# Allegro board AVRUSB500.brd
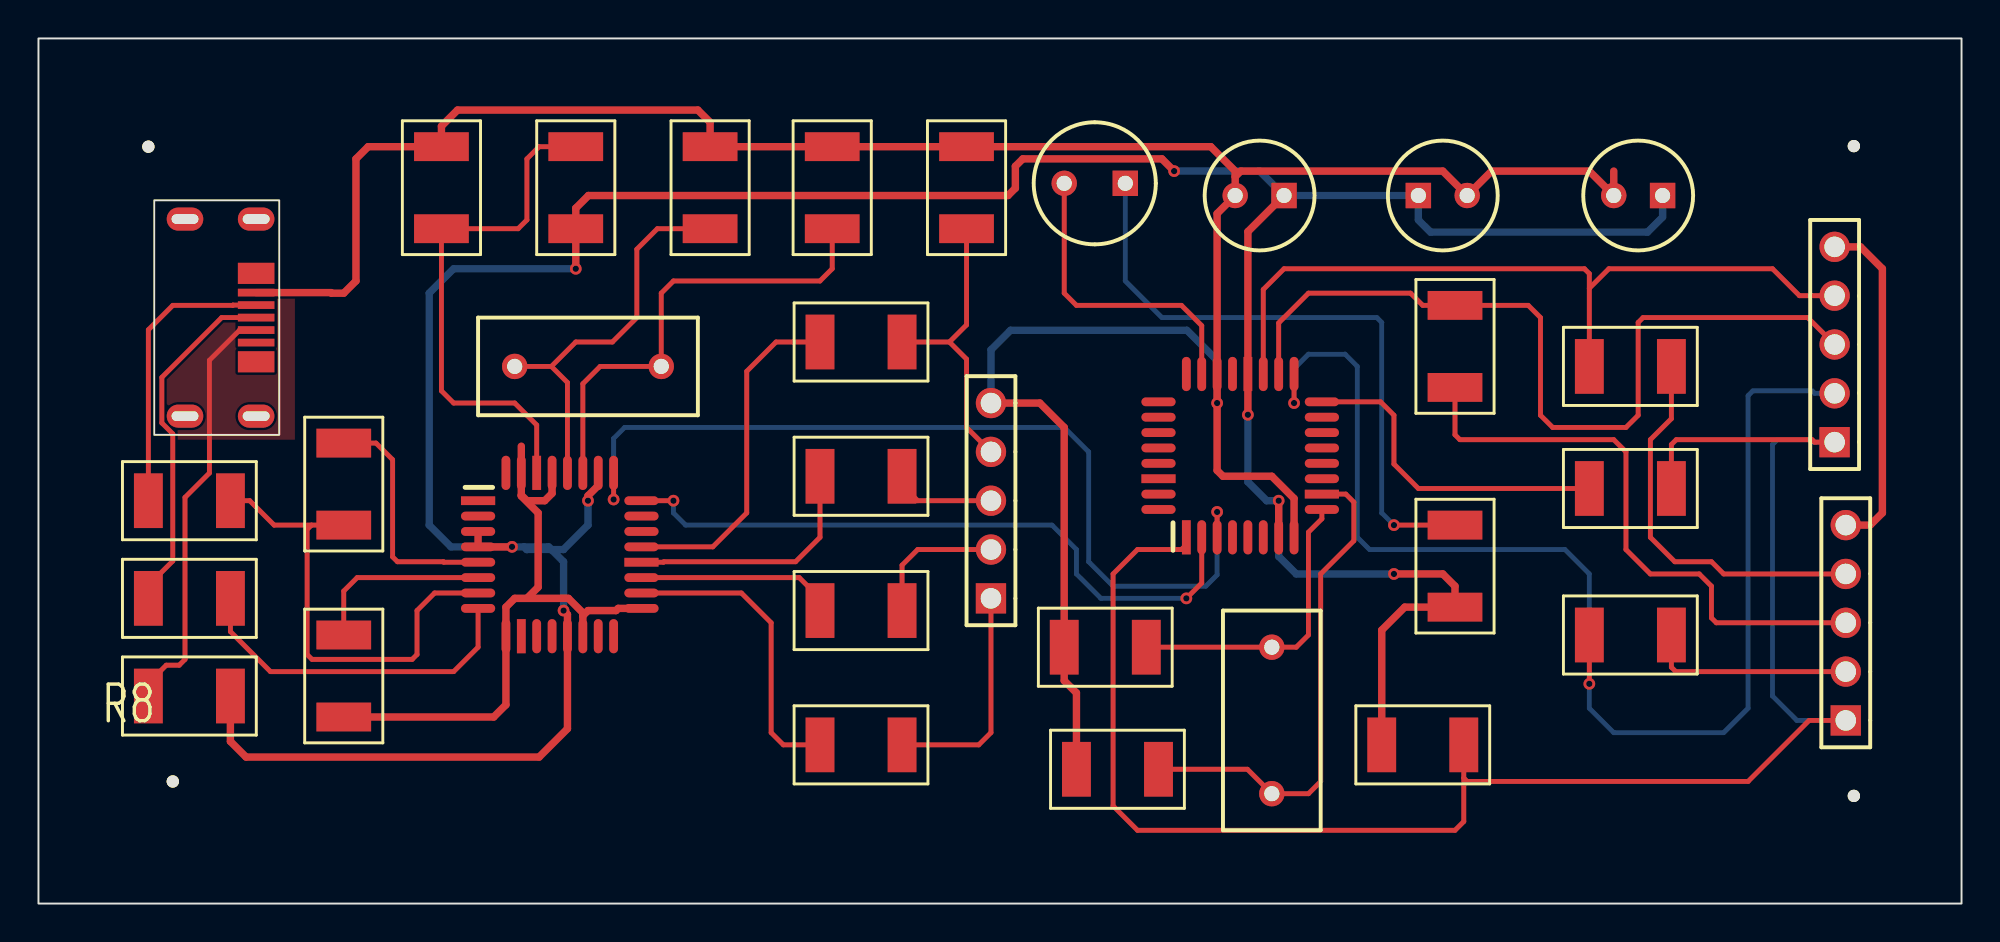
[diagram p0: board, top side]
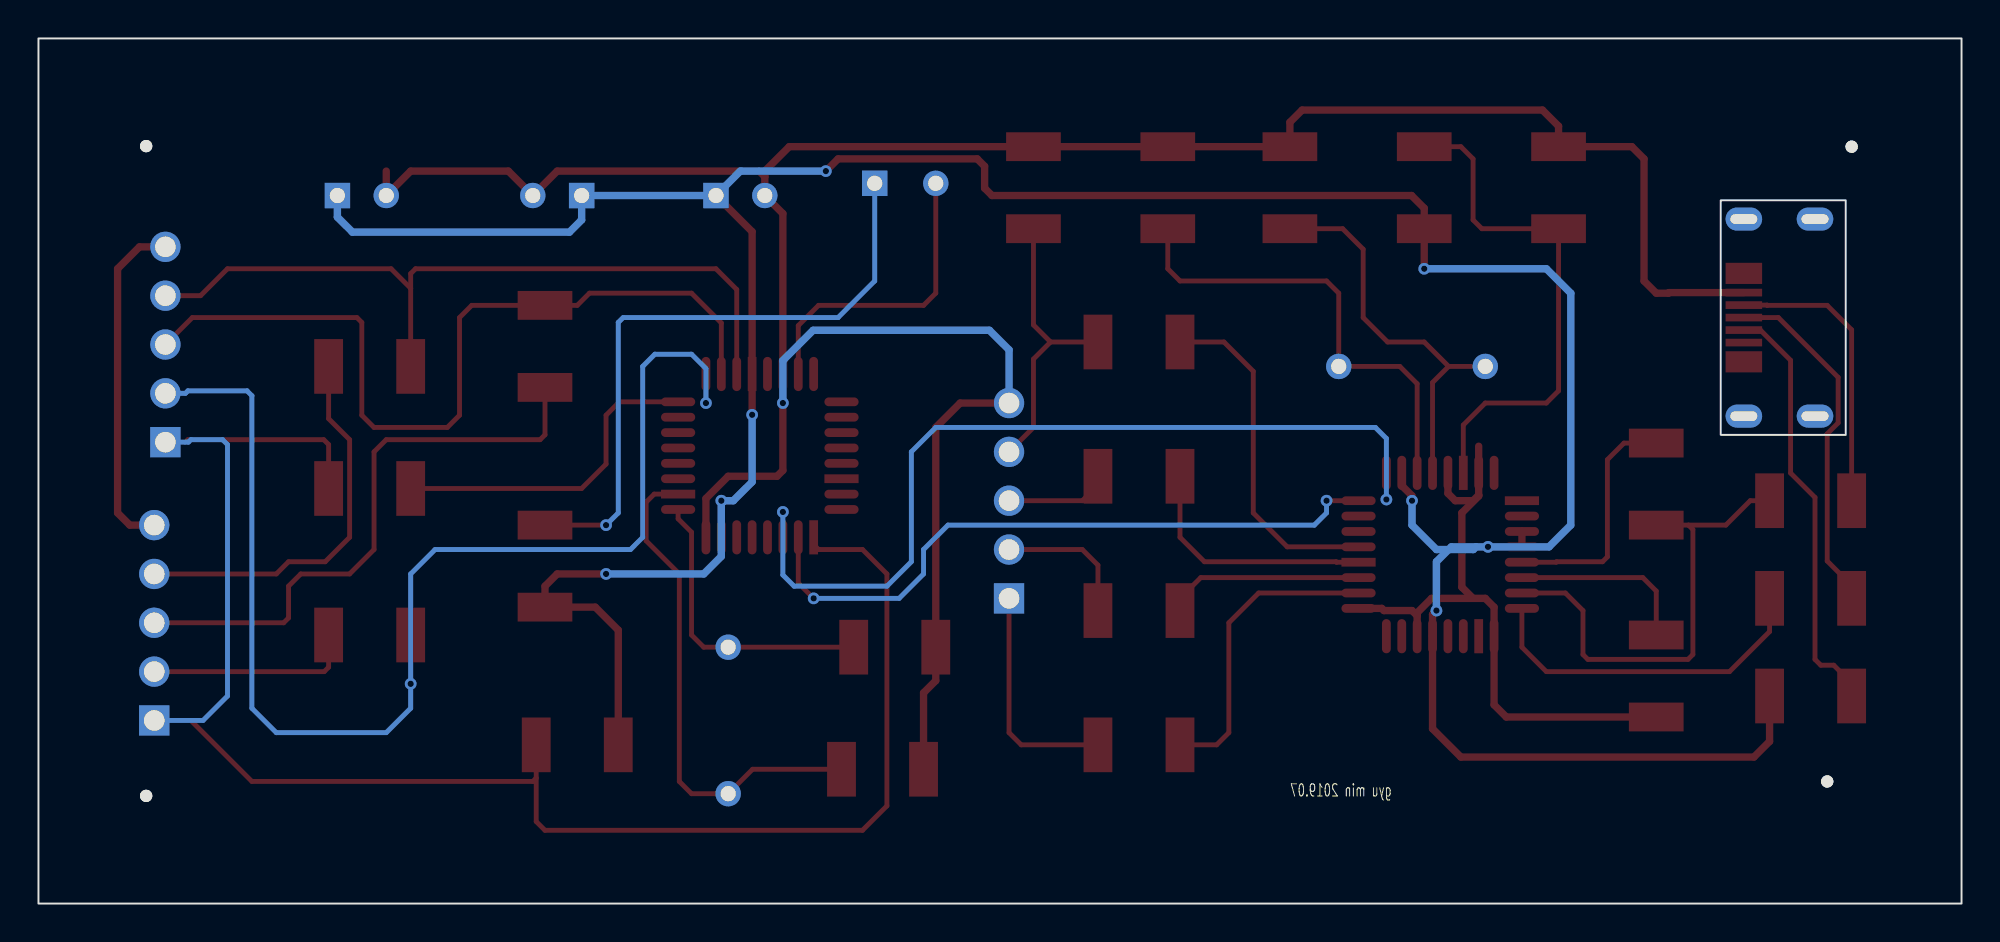
[diagram p1: board, bottom side, seen from below]

Outline 100 x 45 mm; copper layers: TOP, BOTTOM. Coordinates in mm from the lower left corner of the outline.
Outline path: rectangle 0,0 100,45

## Design rules (mm)
constraint set DEFAULT: min track width 0.254

## Placement (name value [footprint] x y rotation side)
C1  47nF  [SML2015]  20.95 39.37 270 top
C2  27pF  [SML2015]  34.92 39.37 270 top
C3  27pF  [SML2015]  41.27 39.37 270 top
C4  47nF  [SML2015]  15.88 13.97 270 top
C5  100nF  [CPCYL1D225LS100031]  64.77 36.83 180 top
C6  1uF  [CPCYL1D225LS100031]  84.45 36.83 180 top
C7  100nF  [SML2015]  53.34 13.34 0 top
C8  100nF  [SML2015]  53.98 6.99 0 top
C9  100nF  [CPCYL1D225LS100031]  71.75 36.83 0 top
C10  22nF  [SML2015]  48.26 39.37 270 top
D1  LED  [CYLD250LS125031]  56.52 37.47 180 top
IC1  ATmega8  [QUAD80M32WG900]  59.69 19.05 0 top
J1  bbpg_Bitbang  [BLKCON100VHTM1SQSW1005]  49.53 15.88 90 top
J2  USBA  [MICRO_USB]  7.62 30.48 270 top
J3  avrusb500_out  [BLKCON100VHTM1SQSW1005]  93.98 9.53 90 top
J4  firmware_in  [BLKCON100VHTM1SQSW1005]  93.4 24 90 top
NOREF  -  [unnamed]  94.4 5.6 0 top
NOREF#2  -  [unnamed]  5.71 39.37 0 top
NOREF#3  -  [unnamed]  6.99 6.35 0 top
NOREF#4  -  [unnamed]  94.4 39.4 0 top
R1  470  [SML2015]  27.94 39.37 270 top
R2  220  [SML2015]  40.64 29.21 0 top
R3  220  [SML2015]  40.64 22.23 0 top
R4  220  [SML2015]  40.64 15.24 0 top
R5  27  [SML2015]  5.71 15.88 0 top
R6  27  [SML2015]  5.71 20.95 0 top
R7  1.5k  [SML2015]  15.88 19.68 90 top
R8  2.2  [SML2015]  5.71 10.79 0 top
R9  10k  [SML2015]  69.85 8.26 0 top
R10  470  [SML2015]  73.66 19.68 270 top
R11  1k  [SML2015]  80.64 27.94 0 top
R12  220  [SML2015]  73.66 31.11 270 top
R13  1k  [SML2015]  80.64 13.97 0 top
R14  220  [SML2015]  40.64 8.26 0 top
R15  220  [SML2015]  80.64 21.59 0 top
U1  FT232BM  [QUAD80M32WG900]  22.86 20.95 270 top
Y1  3.6864Mhz  [RAD450X200LS300031]  64.14 5.71 90 top
Y2  6Mhz  [RAD450X200LS300031]  24.77 27.94 0 top

## Library data of the parts
C1-C4 C7 C8 C10 = CAPACITOR NON-POL: alternate symbols: (SML2015)
C5 C9 = CAPACITOR NON-POL: alternate symbols: (SMDCAP)
C6 = CAPACITOR POL: alternate symbols: (SMDCAP)
D1 = LED
IC1 = ATmega8-DIL28_1
J1 J3 J4 = CON5
J2 = CON4_7
R1-R15 = R: alternate symbols: (SML2015)
U1 = FT232BM_2: alternate symbols: (JEDECMS026)
Y1 Y2 = ZTA

## Footprints (pads in the part's own frame, mm; a bottom-side part is the same pattern mirrored in y, then rotated)
BLKCON100VHTM1SQSW1005
  rect 1.575x1.575 hole 1.067: 1(0,0)
  round 1.575 hole 1.067: 2(2.54,0) 3(5.08,0) 4(7.62,0) 5(10.16,0)
CPCYL1D225LS100031
  rect 1.321x1.321 hole 0.787: 1(0,0)
  round 1.321 hole 0.787: 2(2.54,0)
CYLD250LS125031
  rect 1.321x1.321 hole 0.787: 1(0,0)
  round 1.321 hole 0.787: 2(3.175,0)
MICRO_USB
  oval 1.2x1.9 hole 0.5x1.4: (-5.125,3.7) (-5.125,0) (5.125,3.7) (5.125,0)
  rect 1.1x1.9 smd: (-2.3,3.7) (2.3,3.7)
  rect 0.4x1.9 smd: 1(-1.3,3.7) 2(-0.65,3.7) 3(0,3.7) 4(0.65,3.7) 5(1.3,3.7)
QUAD80M32WG900
  rect 0.457x1.778 smd: 1(0,0) 20(3.2,8.496)
  oval 0.457x1.778 smd: 2(0.8,0) 3(1.6,0) 4(2.4,0) 5(3.2,0) 6(4,0) 7(4.801,0) 8(5.601,0) 17(5.601,8.496) 18(4.801,8.496) 19(4,8.496) 21(2.4,8.496) 22(1.6,8.496) 23(0.8,8.496) 24(0,8.496)
  oval 1.778x0.457 smd: 9(7.048,1.448) 11(7.048,3.048) 12(7.048,3.848) 13(7.048,4.648) 14(7.048,5.448) 15(7.048,6.248) 16(7.048,7.048) 25(-1.448,7.048) 26(-1.448,6.248) 27(-1.448,5.448) 28(-1.448,4.648) 29(-1.448,3.848) 31(-1.448,2.248) 32(-1.448,1.448)
  rect 1.778x0.457 smd: 10(7.048,2.248) 30(-1.448,3.048)
RAD450X200LS300031
  round 1.321 hole 0.787: 1(0,0) 2(7.62,0)
SML2015
  rect 1.499x2.845 smd: 1(0,0) 2(4.267,0)
unnamed
  round 0.635 hole 3.175 unplated: (0,0)

## Nets
+5V: J2.4 R8.1
GND: C1.1 C2.1 C3.1 C4.2 C5.2 C6.2 C7.1 C8.1 C9.2 C10.1 IC1.8 IC1.22 J1.5 J2.1 J3.5 J4.5 U1.9 U1.14 U1.17 U1.29 U1.31
VCC: C5.1 C6.1 C9.1 IC1.7(VCC) IC1.20 R1.2 R8.2 R9.1 R10.2 U1.3 U1.4 U1.13 U1.26
BMISO: J1.3 R3.2
BMOSI: J1.2 R4.2
BRESET: J1.1 R14.2
BSCK: C10.2 J1.4 R2.2
D+: J2.2 R6.1
D-: J2.3 R5.1
F_MISO: IC1.18 J4.3 R12.1
F_MOSI: IC1.17 J4.2 R13.1
F_SCK: IC1.19 J4.4 R11.1
MISO: J3.3 R12.2
MOSI: J3.2 R13.2
RESET: IC1.1 J3.1 J4.1 R9.2 R15.2
RXD: IC1.2 U1.24
SCK: J3.4 R11.2
TXD: IC1.3 U1.25
N02483: R6.2 R7.1 U1.7
N02615: R5.2 U1.8
N03527: C4.1 U1.6
N06839: R2.1 U1.21
N06967: R3.1 U1.20
N07033: R4.1 U1.19
N07247: R14.1 U1.18
N11951: R7.2 U1.5
N15182: C7.2 IC1.9 Y1.2
N15289: C8.2 IC1.10 Y1.1
N19734: D1.2(CATHODE) IC1.23
N20572: D1.1 R10.1
N22544: IC1.16 R15.1
N41098: C3.2 U1.27 Y2.2
N41106: C2.2 U1.28(XTOUT) Y2.1
N49165: C1.2 R1.1 U1.30

Pads without a net: IC1 4 5 6 11 12 13 14 15 21 24 25 26 27 28 29 30 31 32; J2 5; U1 1 2 10 11 12 15 16 22 23 32

## Via types
v1: diameter 0.61, hole 0.33, TOP to BOTTOM, 16 vias

## Routing (per net, layer and track width the routed paths; a pad name or vN(x,y) marks a point on that pad's centre or on a via; arc(x,y) is an arc through that point)
+5V: length 22.3
  TOP w0.254: J2.4 10.46,29.83 8.89,28.26 8.89,22.39 7.62,21.12 7.62,12.7 7.32,12.4 6.64,12.4 5.71,11.47 R8.1
GND: length 198.7
  TOP w0.382: 93.98,19.68 95.25,19.68 95.89,20.32 95.89,33.02 94.75,34.16 J4.5 ; 25.11,21.25 25.11,21.2 25.98,20.32 25.98,16.46 25.4,15.88 ; 25.11,21.25 U1.31 25.11,23.79 ; 25.11,21.25 25.4,20.95 26.33,20.95 26.71,21.34 U1.29 ; 62.23,37.81 62.52,38.1 73.03,38.1 C9.2 75.56,38.1 80.64,38.1 81.92,36.83 81.92,38.1 ; 62.23,37.81 C5.2 61.29,35.89 IC1.22 v1(61.29,26.03) 61.29,22.53 61.59,22.23 64.14,22.23 65.29,21.07 IC1.8 ; 62.23,37.81 62.23,38.1 60.96,39.37 C10.1 C3.1 C2.1 34.92,40.64 34.29,41.27 21.79,41.27 20.95,40.44 C1.1 17.14,39.37 16.51,38.73 16.51,32.38 15.88,31.75 15.24,31.75 15.21,31.78 J2.1 ; 25.4,15.88 24.77,15.88 24.31,15.42 24.31,10.34 23.67,9.7 C4.2 ; 25.4,15.88 27.56,15.88 28.31,15.12 28.31,14.97 ; 28.31,14.97 28.57,15.24 30.04,15.24 30.15,15.35 U1.17 ; 28.31,14.97 28.31,13.91 ; C8.1 53.98,10.96 53.34,11.59 C7.1 53.34,24.77 52.07,26.04 J1.5
  BOTTOM w0.382: v1(61.29,26.03) 61.29,28.25 59.72,29.82 50.55,29.82 49.53,28.8 J1.5
VCC: length 175.8
  TOP w0.382: v1(28.57,20.95) 28.57,21.21 29.11,21.74 U1.26 ; v1(59.05,38.1) 58.42,38.73 51.18,38.73 50.8,38.35 50.8,37.21 50.42,36.83 28.6,36.83 27.94,36.17 v1(27.94,33.02) ; v1(27.3,15.24) 27.51,15.04 27.51,9.09 26.04,7.62 10.79,7.62 9.98,8.43 R8.2 ; v1(62.89,25.43) IC1.20 62.89,34.95 C5.1 ; 22.86,19.36 U1.4 v1(24.62,18.55) ; v1(70.48,17.14) 73.03,17.14 73.66,16.51 R10.2 71.05,15.42 69.85,14.22 R9.1 ; v1(64.49,20.95) IC1.7
  BOTTOM w0.382: 25.25,18.55 v1(24.62,18.55) 21.45,18.55 20.32,19.68 20.32,31.75 21.59,33.02 v1(27.94,33.02) ; 25.25,18.55 25.39,18.41 27.3,18.41 28.57,19.68 v1(28.57,20.95) ; 25.25,18.55 26.53,18.55 27.3,17.78 v1(27.3,15.24) ; v1(62.89,25.43) 62.89,21.93 63.87,20.95 v1(64.49,20.95) 64.49,18.06 65.41,17.14 v1(70.48,17.14) ; v1(59.05,38.1) 63.5,38.1 C5.1 C9.1 71.75,35.56 72.39,34.92 83.67,34.92 84.45,35.71 C6.1
BMISO: length 5.4
  TOP w0.254: J1.3 45.72,20.95 44.91,21.77 R3.2
BMOSI: length 7.3
  TOP w0.254: J1.2 45.72,18.41 44.91,17.6 R4.2
BRESET: length 11.9
  TOP w0.254: R14.2 48.9,8.26 49.53,8.89 J1.1
BSCK: length 15.3
  TOP w0.254: R2.2 47.37,29.21 ; 47.37,29.21 48.26,28.32 48.26,24.77 J1.4 ; 47.37,29.21 48.26,30.1 48.26,35.1
D+: length 15
  TOP w0.254: J2.2 10.12,31.13 10.1,31.11 6.99,31.11 5.71,29.84 R6.1
D-: length 18.4
  TOP w0.254: J2.3 9.53,30.48 6.42,27.37 6.42,25 6.99,24.43 6.99,17.82 5.71,16.55 R5.1
F_MISO: length 43.8
  TOP w0.254: IC1.18 64.49,30.2 66.04,31.75 71.35,31.75 71.98,31.11 R12.1 77.47,31.11 78.11,30.48 78.11,25.4 78.74,24.77 82.55,24.77 83.19,25.4 83.19,30.23 83.44,30.48 92,30.48 J4.3
F_MOSI: length 68.7
  TOP w0.254: R13.1 v1(80.64,11.43) ; IC1.17 v1(65.29,26.04)
  BOTTOM w0.254: J4.2 92.36,26.54 92.23,26.67 89.15,26.67 88.9,26.42 88.9,10.16 87.63,8.89 81.92,8.89 80.64,10.16 v1(80.64,11.43) 80.64,17.14 79.38,18.41 69.22,18.41 68.58,19.05 68.58,27.94 67.94,28.57 66.04,28.57 65.29,27.83 v1(65.29,26.04)
F_SCK: length 40.5
  TOP w0.254: J4.4 91.57,31.62 90.17,33.02 81.66,33.02 80.64,32 ; 80.64,32 80.64,32.77 80.39,33.02 64.77,33.02 63.69,31.94 IC1.19 ; 80.64,32 R11.1
MISO: length 30.8
  TOP w0.254: J3.3 87.25,14.61 87,14.86 87,16.51 86.36,17.14 83.82,17.14 82.55,18.41 82.55,23.5 81.92,24.13 73.91,24.13 73.66,24.38 R12.2
MOSI: length 10.8
  TOP w0.254: 93.98,12.06 85.14,12.06 84.91,12.29 R13.2
RESET: length 92.8
  TOP w0.254: 74.12,6.53 74.29,6.35 88.9,6.35 92.07,9.53 J3.1 ; 74.12,6.53 R9.2 ; 74.12,6.53 74.12,4.27 73.66,3.81 57.15,3.81 55.88,5.08 55.88,17.14 57.15,18.41 59.44,18.41 59.69,18.67 IC1.1 ; J4.1 92.36,24 92.23,24.13 85.17,24.13 84.91,23.88 R15.2
  BOTTOM w0.254: J3.1 91.44,9.53 90.17,10.79 90.17,23.88 90.42,24.13 92.08,24.13 92.2,24 J4.1
RXD: length 35.1
  TOP w0.254: U1.24 v1(33.02,20.95) ; v1(59.69,15.88) 60.49,16.68 IC1.2
  BOTTOM w0.254: v1(33.02,20.95) 33.02,20.32 33.66,19.68 52.7,19.68 53.98,18.41 53.98,17.14 55.24,15.88 v1(59.69,15.88)
SCK: length 20.3
  TOP w0.254: R11.2 84.91,25.22 83.82,24.13 83.82,19.05 85.09,17.78 87,17.78 87.63,17.14 J3.4
TXD: length 47.8
  TOP w0.254: U1.25 v1(29.91,21.02) ; IC1.3 v1(61.29,20.37)
  BOTTOM w0.254: v1(61.29,20.37) 61.29,17.09 60.71,16.51 55.88,16.51 54.61,17.78 54.61,23.5 53.34,24.77 30.48,24.77 29.91,24.19 v1(29.91,21.02)
N02483: length 25
  TOP w0.254: 14.2,19.68 12.26,19.68 10.99,20.95 R6.2 ; 14.2,19.68 R7.1 ; 14.2,19.68 13.97,19.46 13.97,12.95 14.22,12.7 19.43,12.7 19.68,12.95 19.68,15.24 20.6,16.15 U1.7
N02615: length 18
  TOP w0.254: R5.2 9.98,14.15 12.06,12.06 21.59,12.06 22.86,13.34 U1.8
N03527: length 9.6
  TOP w0.254: C4.1 15.88,16.26 16.57,16.95 U1.6
N06839: length 18
  TOP w0.254: U1.21 35.06,18.55 36.83,20.32 36.83,27.69 38.35,29.21 R2.1
N06967: length 13
  TOP w0.254: U1.20 32.5,17.75 32.52,17.78 39.37,17.78 40.64,19.05 R3.1
N07033: length 10.4
  TOP w0.254: U1.19 39.56,16.95 40.64,15.88 R4.1
N07247: length 15.9
  TOP w0.254: R14.1 38.73,8.26 38.1,8.89 38.1,14.61 36.55,16.15 U1.18
N11951: length 12.5
  TOP w0.254: R7.2 17.55,23.95 18.41,23.09 18.41,18.03 18.67,17.78 21.06,17.78 21.08,17.75 U1.5
N15182: length 15.5
  TOP w0.254: IC1.9 66.74,20.02 66.04,19.32 66.04,13.97 65.41,13.34 Y1.2 C7.2
N15289: length 26.3
  TOP w0.254: IC1.10 67.98,21.3 68.4,20.88 68.4,18.87 66.67,17.15 66.67,6.35 66.04,5.71 Y1.1 62.87,6.99 C8.2
N19734: length 16.1
  TOP w0.254: D1.2 53.34,31.75 53.98,31.11 59.44,31.11 60.49,30.06 IC1.23
N20572: length 33.3
  TOP w0.254: R10.1 v1(70.48,19.68)
  BOTTOM w0.254: v1(70.48,19.68) 69.85,20.32 69.85,30.23 69.6,30.48 58.42,30.48 56.52,32.38 D1.1
N22544: length 17.3
  TOP w0.254: R15.1 71.75,21.59 70.48,22.86 70.48,25.4 69.79,26.1 IC1.16
N41098: length 24.4
  TOP w0.254: 41.27,35.1 41.27,33.02 40.64,32.38 33.02,32.38 32.38,31.75 Y2.2 29.21,27.94 28.31,27.04 U1.27
N41106: length 21.1
  TOP w0.254: 34.92,35.1 32.18,35.1 31.11,34.04 31.11,30.48 29.84,29.21 27.94,29.21 26.67,27.94 ; 26.67,27.94 Y2.1 ; 26.67,27.94 27.51,27.1 U1.28
N49165: length 27.2
  TOP w0.254: R1.1 26.04,39.37 25.4,38.73 25.4,35.56 24.94,35.1 20.95,35.1 20.95,26.67 21.59,26.04 24.77,26.04 25.91,24.89 U1.30

## Copper pours and planes (outline as drawn; the poured copper is in the pictures)
+5V on TOP: 13.34,24.13 13.34,41.91 3.17,41.91 3.17,24.13 ; 2 cut-outs

## Text on the board
Ref Des/Silkscreen Bottom: gyu min 2019.07
NCLEGEND-1-2: FIGURE | FINISHED_SIZE | 0.33 | 0.787 | 1.067 | 3.175 | 1.4x0.5 | DRILL CHART: TOP to BOTTOM | ALL UNITS ARE IN MILLIMETERS | PLATED | NON-PLATED | QTY | 16 | 12 | 15 | 4
